# Altium PCB P_dktriac.PcbDoc
Units mil, origin at the board's own origin, x right, y up, seen from the top; angles counter-clockwise.
Board outline 1052.63 x 1609.98 mil, 2 copper layers (Top Layer, Bottom Layer); 15 components, 16 nets, 43 pads, 0 vias.
Unrouted connection lines stored in the file: 2.
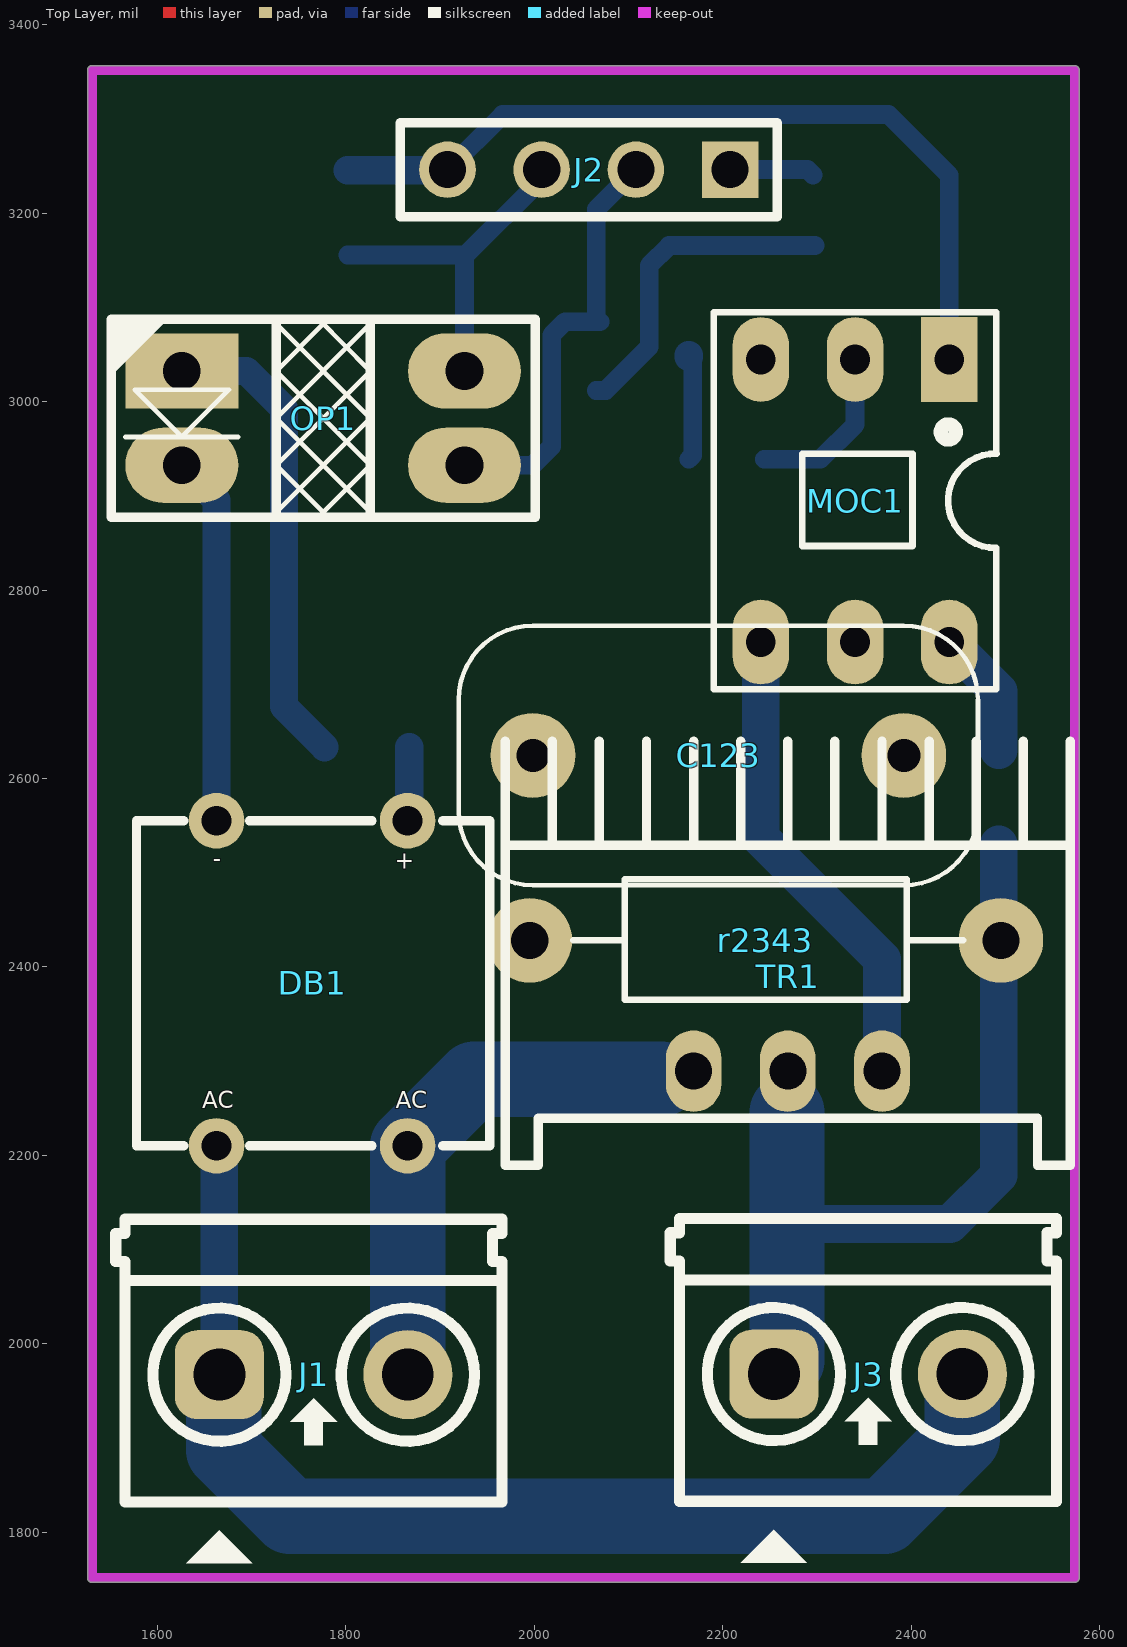
[diagram p0: Top Layer view]
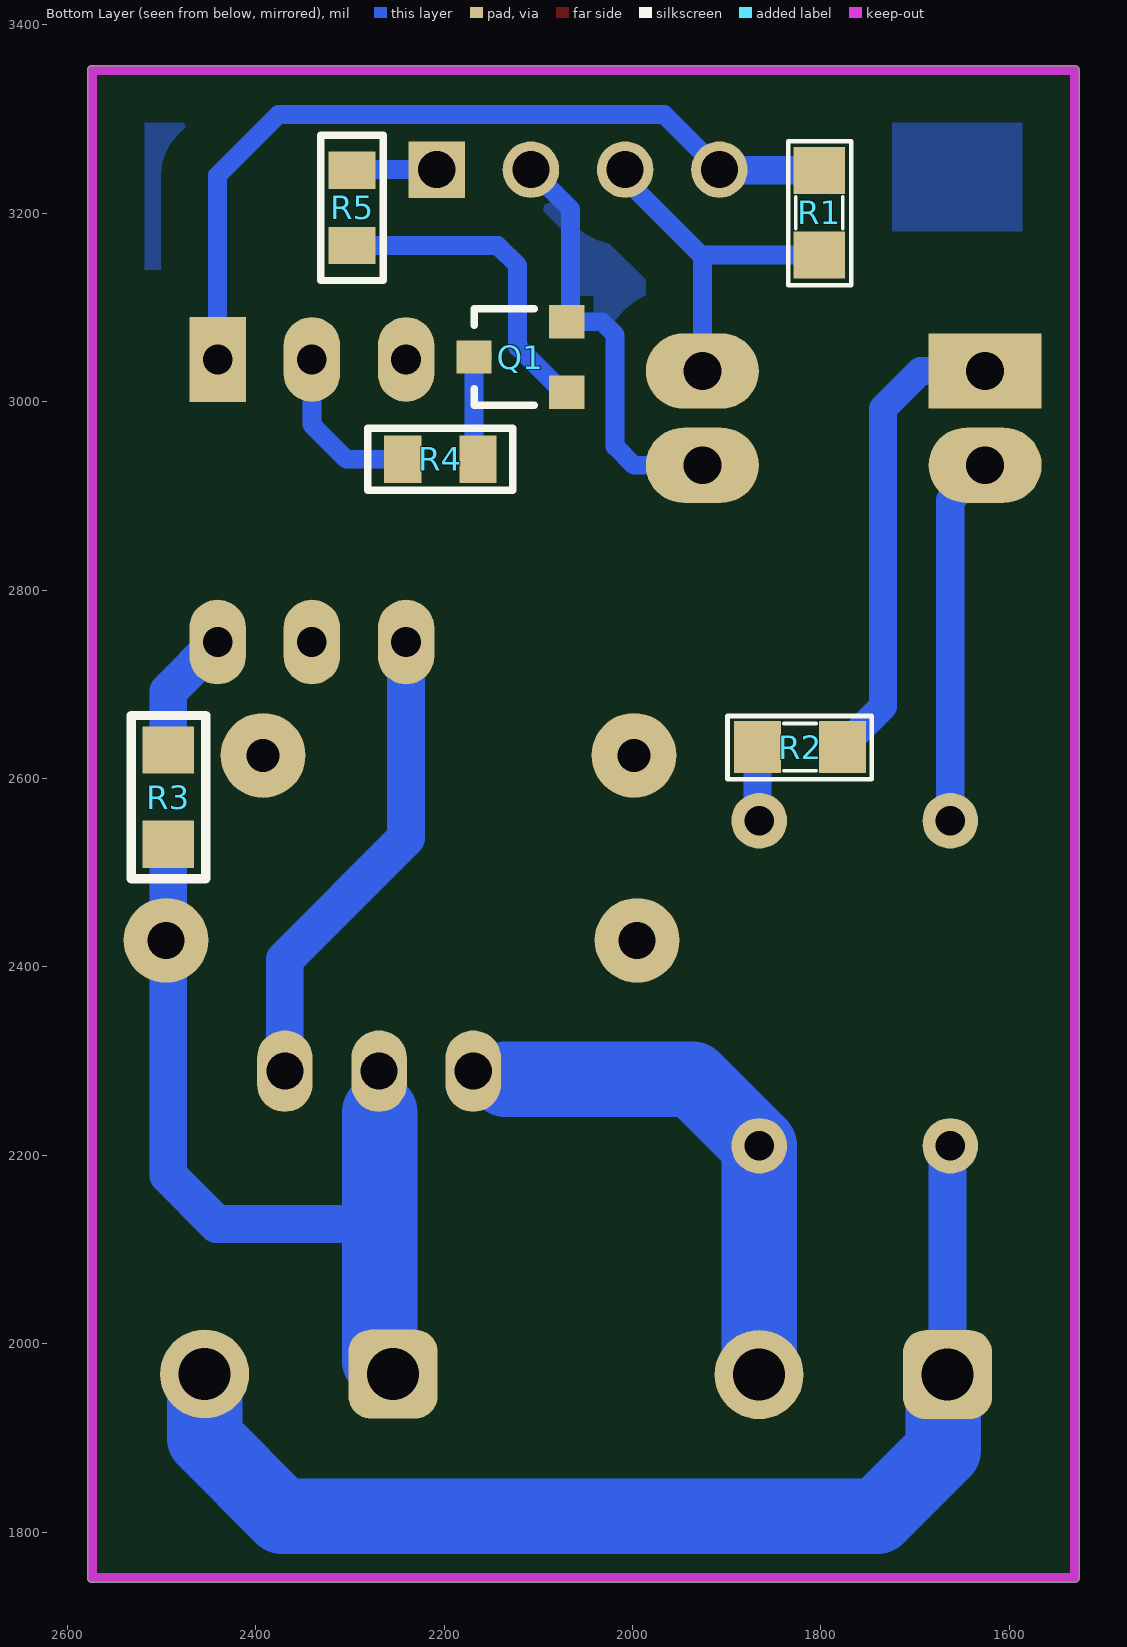
[diagram p1: Bottom Layer view, seen from below]

## Layer stack, top to bottom
Top Solder: solder mask 0.4, Solder Resist, Dk 3.5
Top Layer: signal copper 1.4
Dielectric 1: dielectric 12.6, FR-4, Dk 4.8
Bottom Layer: signal copper 1.4
Bottom Solder: solder mask 0.4, Solder Resist, Dk 3.5

## Board outline
1530.78,1746.76 cw(c1530.78,1751.78) 1525.77,1751.78 1525.77,3351.73 cw(c1530.78,3351.73) 1530.78,3356.75 2573.38,3356.75 cw(c2573.38,3351.73) 2578.39,3351.73 2578.39,1751.78 cw(c2573.38,1751.78) 2573.38,1746.76

## Design rules (kind name [scope] priority, off if disabled: settings)
Clearance [All] p1: gap=8
PolygonConnect [All] p1: connectstyle=Relief reliefconductorwidth=10 reliefentries=4 polygonreliefangle="90 Angle" airgapwidth=10
RoutingVias [All] p1: holewidth=28 width=50 viastyle="Through Hole" minholewidth=28 minwidth=50 maxholewidth=28 maxwidth=50
SolderMaskExpansion [All] p1: expansion=4
Width [All] p1: maxlimit=80 minlimit=20 preferedwidth=30
30 further rules are at their usual default settings.

## Components (designator, comment, footprint, x,y, rotation, side; value= is the part's Value field where it differs from the comment)
C123 "CBB-22n" CAP_MICA_10MM 2392.13,2624.58 r180 top
DB1 "DB107" DB107 1662.64,2210.14 r90 top
J1 "con2" Con2 1865.62,1967.27 r0 top
J2 "Jum4x1_2.54" Jum4Ð_2.54 2107.79,3246.28 r180 top
J3 "con2" Con2 2454.17,1967.88 r0 top
MOC1 "MOC3021" DIP6 2335.36,2884.85 r180 top
OP1 "PC817" PC817-dip 1766.71,2980.28 r90 top
Q1 "C1815" SOT23-321 2118.93,3047.42 r90 bottom
R1 "10k" 0805 1790.04,3204.48 r90 bottom
R2 "56k" 0805 1818.28,2621.51 r180 bottom
R3 "220" RES_SMD_0805 2492.88,2580.26 r90 bottom
R4 "1k" "DIEN TRO 0805" 2203.92,2938.93 r0 bottom
R5 "1k" "DIEN TRO 0805" 2297.7,3205.68 r90 bottom
r2343 "68" R1W 1995.11,2428.26 r0 top
TR1 "BTA12-600" BTA6-600 2169,2289.41 r0 top

## Footprints (in the part's own frame and the unit in brackets; to place one, negate y for a bottom-side part, rotate by r counter-clockwise, add the part's x,y. Pads: shape width x height; smd on the part's side, far side on the other; paste and mask are expansions set on the pad)
0805 [mil]
  rect 50x55 smd: 1(-48.94,11.81) 2(41.06,11.81)
  silkscreen extent -81,-22 72,45, body extent -44,-15 36,35, height 24
BTA6-600 [mm] "TRIAC BTA6/6A/600V"
  oval 1.5x2.2 hole 1: 1(0,0) 2(2.54,0) 3(5.08,0)
  oval 0x1.8 on Top Paste: ""(2.54,5.08)
  silkscreen extent -5.08,-2.54 10.16,8.89, body extent -2.41,-2.08 7.49,2.42, height 18.7
CAP_MICA_10MM [mil]
  round 90 hole 35: 1(0,0) 2(393.7,0)
  silkscreen extent -79,-138 472,138, body extent -60,-100 452,97, height 571
Con2 [mm]
  rrect50% 2.4x2.4 hole 1.4: 1(-5.08,0)
  round 2.4 hole 1.4: 2(0,0)
  silkscreen extent -7.87,-5.08 2.54,4.19, body extent -8.22,-4.05 2.54,4.95, height 12.5
DB107 [mm]
  round 1.5 hole 0.8: 1(0,0) 2(0,-5.15) 3(8.765,-5.15) 4(8.765,0)
  silkscreen extent 0,-7.37 8.76,2.16, body extent -0.31,-7.32 9.09,2.08, height 6.65
"DIEN TRO 0805" [mil] "Chip Resistor; Body 2.0 x 1.3 mm (LxW typ)"
  rect 39.37x50 smd: 1(-40,0) 2(40,0)
  silkscreen extent -77,-33 77,33, body extent -39,-25 39,25, height 31
DIP6 [mil]
  rect 60x90 hole 31.5: 1(-105,-160)
  oval 60x90 hole 31.5: 2(-5,-160) 3(95,-160) 4(95,140) 5(-5,140) 6(-105,140)
  silkscreen extent -155,-210 145,190, body extent -163,-167 155,147, height 170
Jum4Ð_2.54 [mil]
  rect 60x60 hole 39.37: 1(-100,0)
  round 60 hole 39.37: 2(0,0) 3(100,0) 4(200,0)
  silkscreen extent -150,-50 250,50, body extent -150,-50 250,50, height 276
PC817-dip [mil]
  rect 80x120 hole 40: 1(52.26,140.91)
  oval 80x120 hole 40: 2(-47.74,140.91) 3(-47.74,-159.09) 4(52.26,-159.09)
  silkscreen extent -103,-234 110,218, body extent -88,-164 93,146, height 169
R1W [mil] "R 1W, 2 pin, 500mil"
  round 90 hole 39.37: 1(0,0) 2(500,0)
  silkscreen extent 46,-63 460,65
RES_SMD_0805 [mil]
  rect 50x55 smd: 1(-50,0) 2(50,0)
  silkscreen extent -87,-40 87,39, body extent -45,-27 45,27, height 30
SOT23-321 [mm]
  rect 0.9x0.95 smd mask+0: 1(0.95,-1.25)
  rect 0.9x0.95 smd: 2(0,1.25) 3(-0.95,-1.25)
  silkscreen extent -1.3,-0.38 1.3,1.25, body extent -1.52,-1.23 1.48,1.27, height 1.06

## Part data
C123: library part CAP, "Cap np  1pF - 472pF"
MOC1: library part MOC3021_1, "Single Opto"
Q1: "NPN 600mW, ECB"
R1 R2: library part res_0805
R3 r2343: library part R1W, "Resistor 1W"
R4 R5: library part R0805, "Resistor SMD 0805"
TR1: "Silicon Bidirectional Triode Thyristor"

## Nets (pads, with @x,y where several pads share a name; then routed paths per layer and width w, separated by ;. In a path a pad name is that pad's centre, name@x,y a point inside that pad or via, vN(x,y) a via of type N, cw(c..) or ccw(c..) an arc to the next point about the centre after c; other vN are vias at no path point)
DK_TRIAC_VDK: J2.1 R5.2 | length 90.4
  Bottom Layer w20: J2.1 2289.93,3246.28 R5.2@2295.77,3240.45
DT0_VDK: J2.3 OP1.4 R1.1 | length 372.2
  Bottom Layer w20: R1.1 1924.54,3155.54 1925.8,3154.28 ; OP1.4 1925.8,3154.28 ; J2.3 2007.79,3236.27 1925.8,3154.28
GND_VDK: J2.2 OP1.3 Q1.1 | length 456.1
  Bottom Layer w20: OP1.3 1998.49,2932.54 2018.44,2952.49 2018.44,3070.88 2032.38,3084.82 Q1.1@2063.75,3084.82 ; Q1.1 Q1.1@2063.75,3084.82 ; J2.2 2065.75,3204.24 2065.75,3086.81 Q1.1@2063.75,3084.82
L: DB1.2 J1.2 TR1.1 | length 541.3
  Bottom Layer w80: J1.2 1865.62,2209.92 DB1.2 1936.22,2280.97 2134.44,2280.97
N: DB1.1 J1.1 J3.2 | length 1239.4
  Bottom Layer w40: DB1.1 1665.62,2207.16 J1.1
  Bottom Layer w80: J1.1@1670.32,1967.27 1670.32,1887.09 1740.24,1817.17 2371.61,1817.17 2454.17,1899.74 J3.2
NetC123_1: C123.1 MOC1.4 TR1.3 | length 508.7
  Bottom Layer w40: MOC1.4 2240.36,2536.8 2369,2408.16 TR1.3
NetC123_2: C123.2 r2343.1
NetDB1_3: DB1.3 R2.1 | length 78.9
  Bottom Layer w30: DB1.3 1867.22,2557.04 R2.1
NetDB1_4: DB1.4 OP1.2 | length 392.6
  Bottom Layer w30: OP1.2 1662.64,2895.7 DB1.4
NetJ3_1: J3.1 R3.1 r2343.2 TR1.2 | length 881.1
  Bottom Layer w40: 2268.17,2127.18 2441.2,2127.18 2492.88,2178.86 R3.1
  Bottom Layer w80: J3.1 2268.17,1981.87 2268.17,2127.18 2268.17,2245.62
NetMOC1_2: MOC1.2 R4.2 | length 180.9
  Bottom Layer w20: R4.2 2303.63,2938.93 2340.36,2975.65 MOC1.2
NetMOC1_6: MOC1.6 R3.2 | length 136.3
  Bottom Layer w40: MOC1.6 2492.88,2692.33 R3.2
NetOP1_1: OP1.1 R2.2 | length 502.1
  Bottom Layer w30: OP1.1 1694.29,3032.54 1734.17,2992.66 1734.17,2676.37 R2.2
NetQ1_2: Q1.2 R4.1 | length 112.3
  Bottom Layer w20: R4.1 2168.15,2943.15 Q1.2
  Bottom Layer w30: Q1.2@2163.92,3047.42 2163.92,3049.16 Q1.2@2164.17,3049.41
NetQ1_3: Q1.3 R5.1 | length 346.2
  Bottom Layer w20: Q1.3@2065.75,3012.01 2075.77,3012.01 2121.94,3058.19 2121.94,3144.63 2143,3165.68 R5.1
VCC_VDK: J2.4 MOC1.1 R1.2 | length 885.1
  Bottom Layer w20: J2.4 1966.24,3304.73 2375.9,3304.73 2440.36,3240.27 MOC1.1
  Bottom Layer w30: R1.2 1907.05,3245.54 J2.4
pads on no net: MOC1.3 MOC1.5 TR1.

## Polygon pours and split planes (outlines as drawn)
GND_VDK on Bottom Layer "Bottom Layer-No Net" (solid, pour order 12): 1803.13,3180.96 1531.25,3180.96 1530.78,3181.43 1530.78,3351.73 2575.19,3351.73 2577.01,3349.92 2574.09,3347 2574.09,2957.64 1930.33,2957.64 1929.36,2956.66 1927.42,2958.61 1927.42,3181.93 1798.27,3181.93 1797.3,3182.91

## Keep-outs
Keep-Out Layer:
  lines w10: 1530.78,1751.78 2573.38,1751.78 2573.38,3351.73 1530.78,3351.73 1530.78,1751.78

## Text inside footprints (layer, text, board x,y; h text height)
DB1: Top Overlay "AC" at 1647.64,2250.14 h18; Top Overlay "AC" at 1852.64,2250.14 h18; Top Overlay "+" at 1872.64,2520.14 h18 r180; Top Overlay "-" at 1667.64,2520.14 h18 r180